# Altium PCB Right_Board.PcbDoc (part 2 of 2)
Units mm, origin at the board's own origin, x right, y up, seen from the top; angles counter-clockwise.
Board outline 34.7 x 82.01 mm, 6 copper layers (Top Layer, Layer 2, Layer 3, Layer 4, Layer 5, Bottom Layer), stack 1.538 mm thick; 65 components, 45 nets, 288 pads, 262 vias.
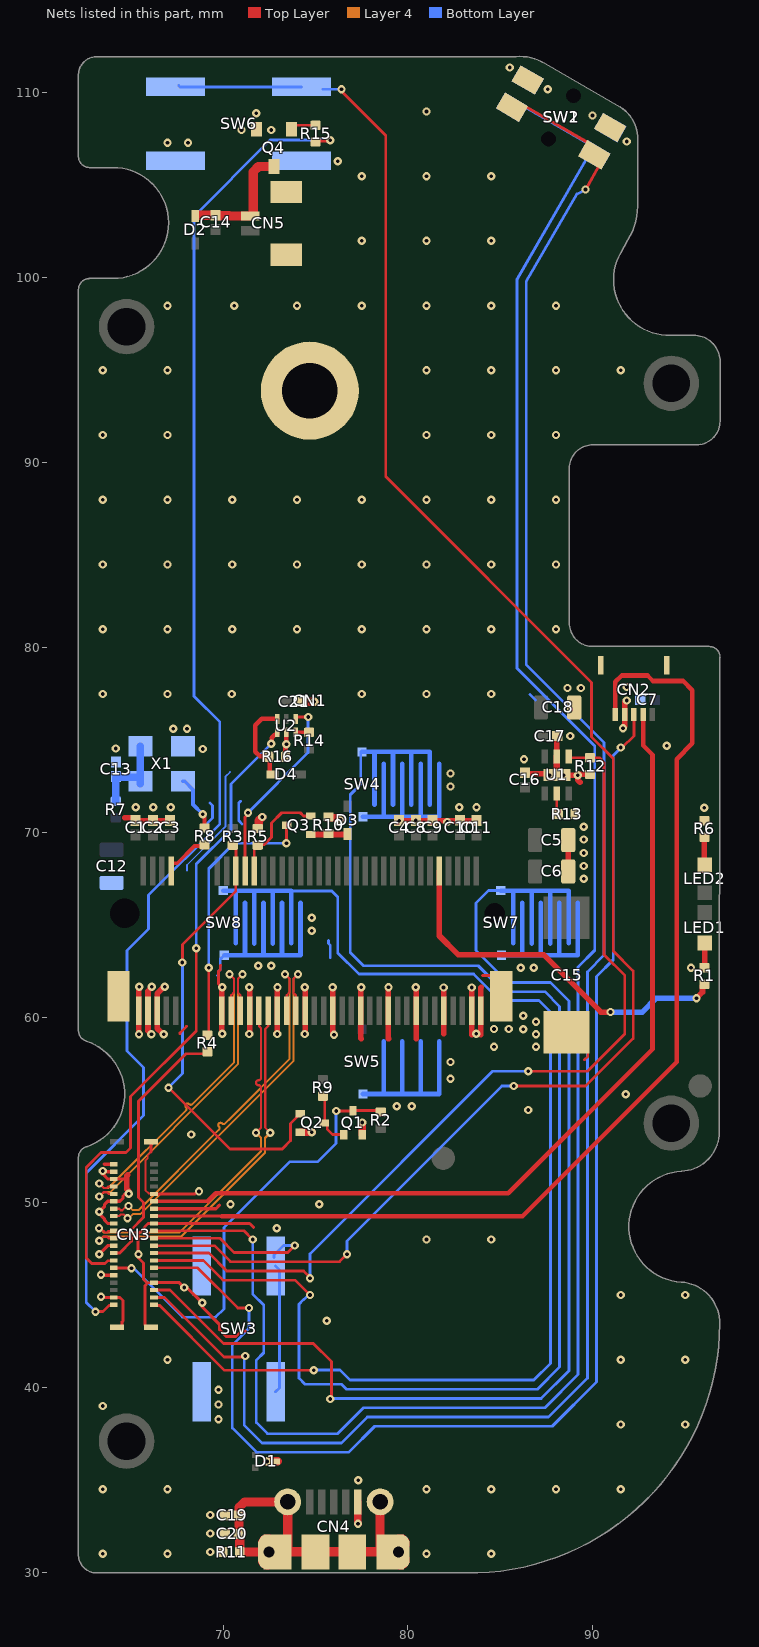
[diagram p6: the nets of this part, all layers, seen from the top]

## Via types
v1: diameter 0.45, hole 0.2, Top Layer to Bottom Layer, tented both sides, 262 vias

## Nets (pads, with @x,y where several pads share a name; then routed paths per layer and width w, separated by ;. In a path a pad name is that pad's centre, name@x,y a point inside that pad or via, vN(x,y) a via of type N, cw(c..) or ccw(c..) an arc to the next point about the centre after c; other vN are vias at no path point) (continued)
GND: C1.2 C2.2 C3.2 C4.2 C5.2 C6.2 C7.2 C8.2 C9.2 C10.2 C11.2 C12.2 C13.2 C15.2 C16.2 C17.2 C18.2 C19.2 C20.2 C21.2 CN1.1 CN1.3 CN1.9 CN1.15 CN1.21 CN1.27 CN1.33 CN1.39 CN1.45 CN1.51 CN1.57 CN1.71 CN1.73 CN1.75 CN1.MP1 CN1.MP2 CN1.MP3 CN2.4 CN2.6 CN2.7 CN3.2 CN3.4 CN3.6 CN3.9 CN3.12 CN3.13 CN3.17 CN3.18 CN3.24 CN3.32 CN3.33 CN3.38 CN3.MP1 CN3.MP3 CN3.MP4 CN4.5 CN5.3 CN5.4 D1.3 Q1.2 Q2.2 Q4.2 R5.2 R6.1 R10.2 R11.2 R12.1 R13.2 R16.2 SW1.2 SW1.4 SW2.2 SW2.4 SW3.2 SW3.3 SW4.2 SW5.2 SW6.2 SW6.3 SW7.2 SW8.2 U1.5 U1.7 U2.2 X1.2 | length 113.2
  Top Layer w0.1: 66.107,52.732 65.925,52.55 65.925,52.398 65.812,52.285 65.812,50.647 65.971,50.489 66.217,50.489 CN3.9@66.231,50.475
  Top Layer w0.15: v1@65.425,47 65.7,46.725 65.7,45.85 65.875,45.675 65.875,45.625 ; CN3.MP3@65.825,43.325 65.775,43.375 65.775,45.5 65.941,45.666 CN3.33@66.272,45.666 ; 66.107,52.732 CN3.MP1@66.107,53.276 ; 67.675,59.125 67.675,59.175 68.025,59.525 ; 69.8,43.125 70.175,42.75 70.7,42.75 71,43.05 ; 69.875,62.825 69.85,62.8 69.85,62.6 69.75,62.5 69.75,61.825 69.944,61.631 v1@69.975,61.6 ; 84.025,62.275 84.7,62.275 CN1.MP1@84.725,62.25 ; 89.55,57.725 89.725,57.9 C15.2@89.725,58.2
  Top Layer w0.17: v1(63.3,47.2) 63.597,47.497 63.597,47.499 63.764,47.666 CN3.24@64.092,47.666 ; v1(63.4,44.9) 63.434,44.866 64.42,44.866 64.587,44.699 64.587,43.586 64.53,43.529 64.53,43.321 64.465,43.256 CN3.MP4@64.257,43.256 ; v1(63.4,46.1) 63.434,46.066 CN3.32@64.092,46.066 ; v1@63.429,51.574 63.468,51.535 63.511,51.535 63.78,51.266 CN3.6@64.092,51.266 64.655,51.266 64.666,51.277 ; v1@63.526,51.686 63.546,51.666 CN3.4@64.092,51.666 ; 63.577,52.075 63.586,52.066 CN3.2@64.092,52.066 ; 63.753,48.876 63.762,48.866 CN3.18@64.092,48.866 ; 63.753,48.876 63.597,49.033 63.597,49.103 63.3,49.4 v1(63.3,49.5) 63.597,49.797 63.597,49.899 63.764,50.066 63.967,50.066 64.42,50.066 64.587,50.233 64.587,50.351 64.713,50.477 v1(64.903,50.477) ; v1@65.425,47 v1(65.425,47.2) 65.4,47.225 65.4,48.3 65.777,48.677 65.777,48.699 65.944,48.866 66.147,48.866 CN3.17@66.272,48.866 71.434,48.866 71.65,48.65 ; CN3.33@66.272,45.666 67.634,45.666 v1(67.9,45.4) 68.05,45.4 v1(68.875,44.575) 68.875,44.35 69.8,43.425 69.8,43.125 ; CN3.13@66.272,49.666 69.616,49.666 69.8,49.85 ; CN3.9@66.272,50.466 68.49,50.466 68.624,50.6 v1(68.7,50.6) ; 71,43.05 71.2,43.05
  Top Layer w0.25: R16.2@73.375,74.1 73.375,74.7 v1@73.425,74.75 ; v1@73.425,74.8 U2.2@73.425,75.425
  Top Layer w0.3: 64.696,70.8 64.979,70.8 64.984,70.795 65.155,70.795 65.275,70.675 C1.2@65.275,70.655 C2.2@66.2,70.655 ; 64.85,51.5 64.8,51.45 64.8,50.725 64.903,50.622 v1(64.903,50.477) ; v1(65.45,59.1) 65.44,59.11 65.44,61.599 65.475,61.634 v1(65.475,61.675) ; v1(66.125,59.1) 65.94,59.285 65.94,61.435 66.15,61.645 v1(66.15,61.675) ; C2.2@66.2,70.65 67.1,70.65 C3.2@67.15,70.7 ; v1@66.805,59.045 66.805,59.055 66.731,59.129 66.721,59.129 66.44,59.41 66.44,61.294 66.821,61.675 v1(66.85,61.675) ; v1@69.94,61.6 CN1.57@69.94,60.374 69.94,59.135 v1(69.95,59.125) ; v1@69.944,61.631 v1(69.948,61.635) ; v1(71.423,59.11) 71.44,59.127 CN1.51@71.44,60.374 71.44,61.618 v1(71.423,61.635) ; v1(72.923,59.11) 72.94,59.127 CN1.45@72.94,60.374 72.94,61.627 v1(72.948,61.635) ; v1(74.423,59.11) 74.44,59.127 CN1.39@74.44,60.374 74.44,61.618 v1(74.423,61.635) ; v1(75.923,61.635) 75.94,61.618 CN1.33@75.94,60.374 75.94,59.135 v1(76,59.075) ; 77.473,58.858 77.44,58.891 CN1.27@77.44,60.374 77.44,61.602 v1(77.473,61.635) ; 78.948,58.85 78.94,58.858 CN1.21@78.94,60.374 78.94,61.627 v1(78.948,61.635) ; C4.2@79.525,70.655 83.72,70.655 C11.2@83.775,70.6 ; v1(80.423,61.635) 80.44,61.618 CN1.15@80.44,60.374 80.44,58.85 ; v1(81.925,61.625) 81.94,61.61 CN1.9@81.94,60.374 81.94,59.124 ; 83.44,59.073 83.45,59.083 v1(83.45,61.625) ; v1(83.69,59.124) 83.889,59.124 83.94,59.073 CN1.1@83.94,60.374 83.94,61.605 83.97,61.635 ; C16.2@86.4,73.175 87.575,73.175 v1(87.65,73.1) ; U1.5@88.05,74.125 C17.2@88.05,75.175 ; v1(88.425,73.1) v1@89.15,73.1 ; C6.2@88.625,68.25 88.665,68.29 C5.2@88.665,69.6 ; v1(89.175,73.1) 89.175,72.85 89.3,72.725 ; v1@89.3,73.15 R12.1@89.85,73.15 ; v1(91.625,75.65) 91.714,75.739 CN2.4@91.714,76.394 91.714,77.039 v1(91.825,77.15)
  Top Layer w0.35: U1.7@88.05,73.125 U1.5@88.05,74.125
  Top Layer w0.4: Q2.2@74.175,53.8 v1@74.819,53.8 ; R10.2@75.7,70.85 75.736,70.814 76.223,70.814 76.336,70.7 v1(76.35,70.7) ; CN4.5@77.292,33.811 77.292,32.658 v1@77.3,32.65 ; v1@77.511,54.315 77.524,54.302 Q1.2@77.524,53.657
  Top Layer w0.45: R5.2@71.875,70.225 71.9,70.225 71.925,70.25 71.925,70.65 v1(72.125,70.85) ; v1(72.375,36) D1.3@72.959,36 ; C21.2@74.275,77.075 v1(74.925,77.075)
  Bottom Layer w0.1: 68.05,67.95 68.05,68.25 70.125,70.325 70.125,73.025 70.375,73.275
  Bottom Layer w0.15: 68.875,70.25 69.425,70.8 69.425,71.475 69.3,71.6 ; 69.7,62.275 69.75,62.325 69.75,62.5 69.85,62.6 69.85,63.155 SW8.2@70.061,63.366 ; 70.95,71.7 70.85,71.6 70.85,70.65 71.025,70.475 ; 75.7,64.175 75.7,64 75.8,63.9 75.8,63.25 ; 86.6,77.475 86.9,77.175
  other v1: 63.5,31 67,31 81,31 84.5,31 69.3,31.1 69.3,32.1 77.3,32.625 69.3,33.1 63.5,34.5 67,34.5 81,34.5 84.5,34.5 88,34.5 91.5,34.5 77.31,34.974 91.5,38 95,38 69.75,38.275 63.5,39 69.75,39.075 69.75,39.875 67,41.5 91.5,41.5 95,41.5 75.6,43.6 91.5,45 95,45 81,48 84.5,48 72.9,48.6 70.4,49.9 75.2,49.9 63.5,51.7 68.275,53.675 74.8,53.8 77.525,54.325 86.5,55 79.4,55.2 80.2,55.2 91.775,55.85 82.3,56.7 82.3,57.6 84.648,58.425 86.925,58.425 66.8,59.1 86.925,59.1 84.648,59.385 85.448,59.385 86.225,59.375 86.925,59.775 86.225,60.1 86.1,62.7 86.8,62.7 95.3,62.7 71.9,62.8 72.6,62.8 74.8,64.7 74.8,65.4 89.5,67.5 89.5,68.2 89.5,68.9 89.5,69.625 89.5,70.325 82.125,70.575 79.525,70.65 80.425,70.675 96.025,71.35 65.275,71.375 66.225,71.375 67.175,71.375 82.775,71.375 83.7,71.375 82.3,72.5 82.3,73.2 86.275,73.975 68.9,74.525 64.2,74.55 94,74.7 73.425,74.775 88.775,75.225 67.3,75.625 68.05,75.625 63.5,77.5 67,77.5 70.475,77.5 77.5,77.5 81,77.5 84.5,77.5 88.625,77.825 89.35,77.825 91.825,77.875 63.5,81 67,81 70.5,81 74,81 77.5,81 81,81 84.5,81 88,81 63.5,84.5 67,84.5 70.5,84.5 74,84.5 77.5,84.5 81,84.5 84.5,84.5 88,84.5 63.5,88 67,88 70.5,88 74,88 77.5,88 81,88 84.5,88 88,88 63.5,91.5 67,91.5 81,91.5 84.5,91.5 88,91.5 63.5,95 67,95 81,95 84.5,95 88,95 91.5,95 67,98.5 70.6,98.5 74,98.5 77.5,98.5 81,98.5 84.5,98.5 88,98.5 77.5,102 81,102 84.5,102 77.5,105.5 81,105.5 84.5,105.5 76.2,106.3 67,107.3 68.1,107.3 91.825,107.375 71,108 72.6,108 89.975,108.775 71.8,108.9 81,109 87.55,110.2 85.5,111.375
HK/MISO: CN3.23 SW6.1 SW6.4 | length 97.1
  Top Layer w0.15: CN3.23@66.272,47.666 69.534,47.666 70.4,46.8 76.3,46.8 v1(76.7,47.2) ; v1@76.4,110.1 76.419,110.1 76.518,110.001 76.518,109.982 78.8,107.7 78.8,89.25 89.925,78.125 89.925,75.175 91.1,74 91.1,63.6 92.175,62.525 92.175,58.875 89.6,56.3 v1@85.738,56.3
  Bottom Layer w0.15: SW6.4@67.6,110.4 67.677,110.323 SW6.1@74.236,110.323 ; SW6.1@75.4,110.2 v1(76.4,110.2) ; v1(76.7,47.2) 76.7,47.925 85.075,56.3 v1(85.725,56.3)
L1/SCK: CN3.19 SW1.1 SW1.3 | length 109.1
  Top Layer w0.15: CN3.19@66.272,48.466 66.277,48.47 71.129,48.47 v1(71.6,48)
  Bottom Layer w0.15: v1(71.6,48) 71.6,45.05 72.2,44.45 72.2,41.875 71.8,41.475 71.8,38.1 72.4,37.5 76.2,37.5 77.6,38.9 87.4,38.9 89.2,40.7 89.2,62.741 90.1,63.641 90.1,74.689 85.9,78.889 85.9,99.941 89.718,106.554 SW1.3@90.08,106.651
  Bottom Layer w0.175: SW1.1@85.841,109.134 86.286,109.253 SW1.3@89.884,107.176 ; SW1.3@90.08,106.38 SW1.3@90.08,106.651
L2: CN3.37 SW2.1 SW2.3 | length 104.2
  Top Layer w0.15: CN3.37@66.272,44.866 66.834,44.866 70.05,41.65 71.15,41.65 v1(71.2,41.7) ; v1(89.6,104.775) 90.463,106.269 SW2.1@90.079,106.652
  Top Layer w0.17: SW2.3@86.194,109.358 SW2.1@89.766,107.296
  Bottom Layer w0.15: v1(71.2,41.7) 71.15,41.65 71.15,37.95 72.1,37 76.4,37 77.8,38.4 87.6,38.4 89.7,40.5 89.7,62.475 90.6,63.375 90.6,74.875 86.4,79.075 86.4,99.814 89.122,104.53 v1(89.6,104.775)
L3/MOSI: CN2.3 CN3.29 | length 71.7
  Top Layer w0.15: CN3.29@66.272,46.466 68.634,46.466 70.8,44.3 v1(71.4,44.3) ; v1(91.5,74.6) 91.581,74.6 92.214,75.233 CN2.3@92.214,76.394
  Bottom Layer w0.15: v1(71.4,44.3) 71.4,43.2 70.5,42.3 70.5,37.8 71.8,36.5 76.8,36.5 78.2,37.9 87.8,37.9 90.2,40.3 90.2,62.225 91.1,63.125 91.1,74.162 91.5,74.562 v1(91.5,74.6)
LEFT: CN3.35 SW7.1 | length 57
  Top Layer w0.15: CN3.35@66.272,45.266 67.134,45.266 70.025,42.375 74.875,42.375 75.858,41.392 75.858,39.613 75.857,39.432 v1(75.8,39.375)
  Bottom Layer w0.15: v1(75.8,39.375) 75.825,39.4 87.2,39.4 88.7,40.9 88.7,60.9 87.7,61.9 85.4,61.9 83.675,63.625 83.675,66.2 84.35,66.875 SW7.1@84.95,66.875
LX: CN2.5 CN3.15 | length 58.6
  Top Layer w0.17: CN3.15@66.272,49.266 69.934,49.266
  Top Layer w0.25: 69.934,49.266 86.191,49.266 94.525,57.6 94.525,73.975 95.375,74.825 95.375,77.7 94.875,78.2 93.25,78.2 92.95,78.5 91.55,78.5 91.214,78.164 CN2.5@91.214,76.394
LY: CN2.2 CN3.11 | length 48.7
  Top Layer w0.17: CN3.11@66.272,50.066 69.166,50.066
  Top Layer w0.25: 69.166,50.066 69.6,50.5 85.425,50.5 93.225,58.3 93.225,74.2 92.714,74.711 CN2.2@92.714,76.394
M2_ACT: CN1.10 R1.1 | length 20.4
  Top Layer w0.3: CN1.10@81.69,67.924 81.69,64.425 82.715,63.4 87.33,63.4 90.43,60.3 v1(90.95,60.3) ; v1(95.6,61.05) 95.925,61.375 95.925,61.7 R1.1@96.025,61.8
  Bottom Layer w0.3: v1(90.95,60.3) 92.675,60.3 93.425,61.05 v1(95.6,61.05)
NetC13_1: C13.1 R7.2 X1.1 X1.4 | length 4.4
  Bottom Layer w0.4: R7.2@64.2,71.7 C13.1@64.2,72.975 ; C13.1@64.235,73 X1.4@65.375,73 ; X1.4@65.525,72.65 X1.1@65.525,74.675
NetC14_2: C14.2 CN5.2 D2.2 Q4.3 | length 6.2
  Top Layer w0.5: D2.2@68.679,103.39 C14.2@69.6,103.39 ; C14.2@69.6,103.355 70.325,103.355 ; 70.4,103.35 71.468,103.35 CN5.2@71.471,103.347 ; CN5.2@71.626,103.481 71.626,105.731 71.916,106.021 Q4.3@72.751,106.021
NetD3_1: D3.1 Q3.1 R10.1 | length 2
  Top Layer w0.3: Q3.1@74.75,69.9 75.7,69.9 76.7,69.9 D3.1@76.725,69.925
NetD4_1: D4.1 R16.1 U2.6 | length 4.5
  Top Layer w0.25: R16.1@72.475,74.1 72.525,74.05 D4.1@72.525,73.2 ; R16.1@72.475,74.116 72.463,74.129 71.996,74.129 71.75,74.375 71.75,75.8 72.101,76.151 U2.6@72.925,76.151
NetLED1_2: LED1.2 R1.2 | length 1.4
  Top Layer w0.3: R1.2@95.975,62.7 96.05,62.775 LED1.2@96.05,64.025
NetLED2_2: LED2.2 R6.2 | length 1.8
  Top Layer w0.3: LED2.2@95.85,68.075 LED2.2@95.95,67.975 ; R6.2@96.025,69.7 96.025,68.175 LED2.2@96.125,68.075
NetQ1_1: Q1.1 Q2.3 R9.2 | length 3
  Top Layer w0.15: Q2.3@75.5,54.382 R9.2@75.5,55.9 ; Q2.3@75.575,54.357 75.628,54.305 75.628,53.98 75.925,53.682 Q1.1@76.55,53.682
NetQ4_1: Q4.1 R15.2 | length 1.4
  Top Layer w0.15: Q4.1@73.701,108.041 73.91,108.25 R15.2@75,108.25
NetR8_1: R8.1 X1.3 | length 3.1
  Top Layer w0.2: v1(68.9,71) 68.9,70.932 69,70.832 R8.1@69,70.25
  Bottom Layer w0.2: X1.3@67.825,72.775 67.925,72.775 68.375,72.325 68.375,71.525 v1(68.9,71)
NetR13_1: R13.1 U1.2 | length 1.2
  Top Layer w0.15: U1.2@88.05,72.125 88.05,71.075 R13.1@88.125,71
NetR14_1: R14.1 U2.3 | length 0.7
  Top Layer w0.2: U2.3@73.925,75.425 R14.1@74.65,75.425
PCIE_CLK_N: CN1.53 CN3.10 | length 18.5
  Top Layer w0.118: v1(63.3,50.325) 63.527,50.552 63.715,50.552 63.801,50.466 CN3.10@64.092,50.466 ; CN1.53@70.94,60.374 70.94,61.208 70.814,61.334 70.814,62.114 v1(71.05,62.35)
  Layer 4 w0.11: v1(63.3,50.325) 63.54,50.565 63.891,50.565 70.82,57.494 70.82,62.12 v1(71.05,62.35)
PCIE_CLK_P: CN1.55 CN3.8 | length 18.4
  Top Layer w0.118: v1(63.3,51.025) 63.545,50.78 63.715,50.78 63.801,50.866 CN3.8@64.092,50.866 ; v1(70.35,62.35) 70.586,62.114 70.586,61.354 70.44,61.208 CN1.55@70.44,60.374
  Layer 4 w0.11: v1(63.3,51.025) 63.54,50.785 63.8,50.785 67.956,54.941 67.995,54.98 ccw(c67.911,55.065) 67.995,55.15 67.994,55.151 cw(c68.079,55.236) 67.994,55.321 cw(c68.079,55.236) 68.164,55.321 68.165,55.32 ccw(c68.25,55.405) 68.335,55.32 69.582,56.568 70.6,57.585 70.6,62.1 v1(70.35,62.35)
PCIE_CLK_REQ: CN3.28 U2.1 | length 35.2
  Top Layer w0.15: CN3.28@64.092,46.866 64.082,46.856 63.768,46.856 63.612,46.7 62.9,46.7 62.6,47 62.6,51.9 63.4,52.7 64.75,52.7 65,52.95 65,55.725 68.55,59.275 v1(68.55,63.75)
  Top Layer w0.25: v1(72.6,74.8) 72.638,74.838 72.638,75.138 72.788,75.287 72.925,75.287 U2.1@72.925,75.425
  Bottom Layer w0.15: v1(68.55,63.75) 68.55,68.3 70.425,70.175 70.425,72.625 v1@72.575,74.775
PCIE_CLK_REQ_SW: CN1.52 U2.4 | length 10.4
  Top Layer w0.15: CN1.52@71.19,67.924 71.19,70.834 71.35,70.994 v1(71.35,71.075) ; U2.4@73.925,76.151 73.925,76.2 73.975,76.25 v1(74.6,76.25)
  Bottom Layer w0.15: v1(71.35,71.075) 74.6,74.325 74.6,76.15 v1@74.625,76.175
PCIE_EN: CN3.25 R12.2 U1.4 | length 49.5
  Top Layer w0.15: CN3.25@66.272,47.266 69.234,47.266 70.2,46.3 74.358,46.3 74.7,45.958 v1(74.7,45.9) ; v1(86.5,57.1) 89.7,57.1 91.725,59.125 91.725,62.275 90.6,63.4 90.6,73.8 90.35,74.05 R12.2@89.85,74.05 88.775,74.05 U1.4@88.7,74.125
  Bottom Layer w0.15: v1(74.7,45.9) 74.7,47.225 84.575,57.1 v1(86.5,57.1)
PCIE_nWAKE: CN1.54 Q2.1 R3.2 | length 24.2
  Top Layer w0.15: v1(67.05,56.2) 67.075,56.2 70.375,52.9 73.2,52.9 73.645,53.345 73.645,54.27 73.995,54.62 73.995,54.675 74.12,54.8 Q2.1@74.175,54.8 ; v1(67.8,62.975) 67.8,63.95 70.69,66.84 CN1.54@70.69,67.924 ; CN1.54@70.7,68.25 R3.2@70.7,69.325
  Bottom Layer w0.15: v1(67.05,56.2) 67.05,56.221 67.8,56.971 v1(67.8,62.975)
PCIE_nWAKE_B: CN3.30 Q1.3 R2.2 | length 23.6
  Top Layer w0.15: CN3.30@64.092,46.466 64.1,46.458 65.042,46.458 v1(65.05,46.45) ; v1(76.125,54.95) Q1.3@77.024,54.95 ; Q1.3@77.042,54.975 R2.2@78.475,54.975
  Bottom Layer w0.15: v1(65.05,46.45) 65.15,46.45 67.8,43.8 69.6,43.8 70.05,44.25 70.05,48.65 73.6,52.2 75.1,52.2 76.1,53.2 v1@76.1,54.9
PCIE_RST: Q3.3 R4.1 | length 14.6
  Top Layer w0.15: R4.1@69.15,59.05 69.225,59.125 v1(69.225,62.7) ; v1(73.425,69.425) Q3.3@73.425,70.275
  Bottom Layer w0.15: v1(69.225,62.7) 69.225,68.05 70.6,69.425 v1@73.4,69.425
PCIE_RST_B: CN3.26 R4.2 | length 14
  Top Layer w0.15: CN3.26@64.092,47.266 64.102,47.276 64.416,47.276 65.05,47.91 65.05,48.55 65.7,49.2 65.7,50 65.425,50.275 65.425,55.475 67.997,58.047 69.122,58.047 R4.2@69.15,58.075
PCIE_RST_SW: CN1.50 Q3.2 R5.1 | length 5.5
  Top Layer w0.15: CN1.50@71.69,67.924 R5.1@71.69,69.265 ; R5.1@71.85,69.35 72.225,69.35 72.625,69.75 72.625,70.525 73.175,71.075 74.175,71.075 74.35,70.9 Q3.2@74.75,70.9
  Top Layer w0.25: R5.1@71.84,69.265 R5.1@71.85,69.275
PCIE_RX_N: CN1.41 CN3.16 | length 20.3
  Top Layer w0.118: CN3.16@64.092,49.266 64.383,49.266 64.469,49.352 64.627,49.352 v1(64.836,49.143) ; CN1.41@73.94,60.374 73.94,61.208 73.814,61.334 73.814,62.114 v1(74.05,62.35)
  Layer 4 w0.11: v1(64.836,49.143) 64.898,49.143 65.123,49.367 65.516,49.367 73.82,57.671 73.82,62.12 v1(74.05,62.35)
PCIE_RX_P: CN1.43 CN3.14 | length 20.2
  Top Layer w0.118: CN3.14@64.092,49.666 64.383,49.666 64.469,49.58 64.556,49.58 64.788,49.812 v1(64.888,49.812) ; v1(73.35,62.35) 73.586,62.114 73.586,61.354 73.44,61.208 CN1.43@73.44,60.374
  Layer 4 w0.11: v1(64.888,49.812) 65.113,49.587 65.425,49.587 69.737,53.899 69.776,53.938 ccw(c69.691,54.023) 69.776,54.108 ; 69.776,54.108 cw(c69.86,54.193) 69.776,54.278 cw(c69.86,54.193) 69.945,54.278 ; 69.946,54.278 ccw(c70.03,54.363) 70.115,54.278 70.435,54.597 73.6,57.762 73.6,62.1 v1(73.35,62.35)
PCIE_TX_N: CN1.47 CN3.22 | length 19.8
  Top Layer w0.118: v1(63.3,47.925) 63.527,48.152 63.715,48.152 63.801,48.066 CN3.22@64.092,48.066 ; CN1.47@72.44,60.374 72.44,59.54 72.283,59.383 72.283,54.051 v1(72.557,53.777)
  Layer 4 w0.11: v1(63.3,47.925) 63.535,48.16 67.747,48.16 72.27,52.684 72.27,53.49 v1(72.557,53.777)
PCIE_TX_P: CN1.49 CN3.20 | length 19.8
  Top Layer w0.118: v1(63.291,48.616) 63.392,48.616 63.628,48.38 63.715,48.38 63.801,48.466 CN3.20@64.092,48.466 ; v1(71.782,53.777) 72.055,54.051 72.055,56.15 72.055,56.209 ccw(c71.921,56.209) 71.921,56.343 71.917,56.343 cw(c71.917,56.477) 71.917,56.611 71.921,56.611 ccw(c71.921,56.745) 72.055,56.745 72.055,57.268 72.055,59.425 71.94,59.54 CN1.49@71.94,60.374
  Layer 4 w0.11: v1(63.291,48.616) 63.527,48.38 67.655,48.38 72.05,52.775 72.05,53.509 v1(71.782,53.777)
RIGHT: CN3.39 SW8.1 | length 61
  Top Layer w0.15: CN3.39@66.272,44.466 66.312,44.426 66.574,44.426 70.075,40.925 v1(74.9,40.925)
  Bottom Layer w0.15: 73.686,66.85 75.875,66.85 76.2,66.525 76.2,63.5 77.35,62.35 83.55,62.35 84.975,60.925 87.075,60.925 87.7,60.3 87.7,41.3 86.8,40.4 76.866,40.4 76.316,40.95 74.925,40.95 v1(74.9,40.925)
SELECT: CN3.21 SW3.1 SW3.4 | length 16.5
  Top Layer w0.15: CN3.21@66.272,48.066 69.834,48.066 70.6,47.3 73.5,47.3 v1(73.875,47.675)
  Bottom Layer w0.15: SW3.4@72.75,47.025 72.75,47.164 73.261,47.675 v1(73.875,47.675) ; SW3.1@72.836,39.766 73.05,39.98 73.05,46.352 SW3.4@72.836,46.566
SGND: C19.1 C20.1 CN4.6 CN4.7 CN4.8 CN4.9 CN4.10 CN4.11 R11.1 | length 18.6
  Top Layer w0.5: C19.1@70.86,33.075 70.88,33.095 70.88,33.518 71.173,33.811 CN4.6@73.492,33.811 CN4.8@73.492,31.111 ; C20.1@70.865,32.075 C19.1@70.865,33.075 ; C20.1@70.9,32.04 R11.1@70.9,31.1 72.392,31.1 CN4.8@72.481,31.1 ; CN4.8@72.492,31.111 CN4.8@73.492,31.111 ; CN4.7@78.492,33.811 78.492,31.205 CN4.11@78.587,31.111 ; CN4.11@78.942,31.111 CN4.11@78.587,31.111 ; CN4.8@73.492,31.111 CN4.9@74.992,31.111 CN4.10@76.992,31.111 CN4.11@78.587,31.111
SUSCLK: CN1.68 R8.2 | length 2.3
  Top Layer w0.2: CN1.68@67.225,68.275 67.225,68.333 67.24,68.348 67.523,68.348 68.45,69.275 R8.2@69.075,69.275
UP: CN3.27 SW4.1 | length 71.9
  Top Layer w0.15: CN3.27@66.272,46.866 68.934,46.866 70,45.8 73.9,45.8 v1(74.7,45)
  Bottom Layer w0.15: v1(74.7,45) 74.619,45 74.375,44.756 74.356,44.756 74.1,44.5 74.1,40.5 74.425,40.175 76.4,40.175 76.675,39.9 87,39.9 88.2,41.1 88.2,60.6 87.4,61.4 85.2,61.4 83.8,62.8 77.6,62.8 76.875,63.525 76.875,72.05 77.45,72.625 77.45,74.3 SW4.1@77.475,74.325
VIB: CN3.40 R15.1 | length 74.8
  Top Layer w0.15: v1(63.1,44.1) 63.5,44.1 63.826,44.426 64.052,44.426 CN3.40@64.092,44.466 ; R15.1@75,107.35 75.049,107.399 75.751,107.399 v1(75.8,107.448)
  Bottom Layer w0.15: v1(63.1,44.1) 62.6,44.6 62.6,51.6 65.7,54.7 65.7,57.3 64.8,58.2 64.8,63.625 65.975,64.8 65.975,66.625 69.825,70.475 69.825,75.975 68.425,77.375 68.425,103.325 72.548,107.448 v1(75.8,107.448)
pads on no net: CN1.5 CN1.6 CN1.7 CN1.8 CN1.11 CN1.13 CN1.17 CN1.19 CN1.20 CN1.22 CN1.23 CN1.24 CN1.25 CN1.26 CN1.28 CN1.29 CN1.30 CN1.31 CN1.32 CN1.34 CN1.35 CN1.36 CN1.37 CN1.38 CN1.40 CN1.42 CN1.44 CN1.46 CN1.48 CN1.56 CN1.58 CN1.67 CN1.69 CN1.MH1 CN1.MH2 CN3.MP2 CN4.1 CN4.4 SW1.MH1 SW1.MH2 U1.3

## Polygon pours and split planes (outlines as drawn)
GND on Top Layer "GND_L01_P010" (solid, remove dead copper, pour order 10): 60,115 57.5,112.5 57.5,27.5 60,25 112.5,25 115,27.5 115,112.5 112.5,115
+3V3_M2 on Top Layer "+3V3_M2_L01_P008" (solid, pour order 8): 79.3,70.2 79.2,70.1 79.2,68.9 79.5,68.6 79.5,66.6 79.7,66.4 81.2,66.4 81.3,66.5 81.3,68.9 81.4,69 82.9,69 83.1,68.8 83.1,64.4 83.5,64 89.5,64 89.8,64.3 89.8,66.6 89.6,66.8 87.4,66.8 87.3,66.9 87.3,70.2 87.2,70.3 87.2,70.9 87.6,71.3 87.6,72.4 87.5,72.5 87,72.5 86.8,72.7 84.3,72.7 84.2,72.6 84.2,70.3 84.1,70.2
GND on Top Layer "GND_L01_P014" (solid, pour order 14): 64.302,52.181 63.372,52.181 62.9,51.709 62.9,51.187 62.972,51.115 62.981,51.124 64.797,51.124 64.996,51.323 64.996,52.161 64.922,52.235 64.366,52.235 64.352,52.221
+3V3 on Top Layer "+3V3_L01_P009" (solid, pour order 9): 66,52.1 66,50.9 66.1,50.8 68,50.8 68.4,51.2 85.1,51.2 85.2,51.3 85.2,53.4 85,53.6 78.2,53.6 77.7,53.1 74,53.1 73.3,52.4 66.3,52.4
+3V3_M2 on Top Layer "+3V3_M2_L01_P006" (solid, pour order 6): 63.4,70.2 63.3,70.1 63.3,68.7 63.3,67.2 63.4,67.1 66.7,67.1 66.8,67.2 66.8,69.1 66.9,69.2 67.3,69.2 67.4,69.3 67.4,70.1 67.3,70.2
+3V3 on Top Layer "+3V3_L01_P004" (solid, pour order 4): 93.1,75.4 93.2,75.3 94.4,75.3 94.5,75.4 94.5,77.4 94.4,77.5 93.2,77.5 93.1,77.4
+3V3 on Top Layer "+3V3_L01_P003" (solid, pour order 3): 85.3,77.4 85.2,77.3 85.2,74.6 85.3,74.5 86.5,74.5 86.6,74.4 86.6,73.9 86.7,73.8 87.5,73.8 87.6,73.9 87.6,77.3 87.5,77.4
+3V3 on Top Layer "+3V3_L01_P001" (solid, pour order 1): 70,101.4 70.1,101.3 72.2,101.3 72.3,101.4 72.3,102.7 72.2,102.8 70.1,102.8 70,102.7
GND on Bottom Layer "GND_L06_P015" (solid, remove dead copper, pour order 15): 49.775,114.95 47.275,112.45 47.275,27.45 49.775,24.95 102.275,24.95 104.775,27.45 104.775,112.45 102.275,114.95
+3V3_M2 on Bottom Layer "+3V3_M2_L06_P007" (solid, pour order 7): 63.3,70.2 63.3,70.1 63.3,68.7 63.4,68.6 65.3,68.6 65.5,68.8 65.5,70.7 65.4,70.8 64.9,70.8 64.7,71 63.4,71 63.3,70.9 63.3,70.4
+3V3 on Bottom Layer "+3V3_L06_P005" (solid, pour order 5): 93.1,75.4 93.2,75.3 94.4,75.3 94.5,75.4 94.5,77.4 94.4,77.5 93.2,77.5 93.1,77.4
GND on Layer 2 "GND_L02_P011" (solid, remove dead copper, pour order 11): 57.5,115 55,112.5 55,27.5 57.5,25 110,25 112.5,27.5 112.5,112.5 110,115
+3V3 on Layer 3 "+3V3_L03_P012" (solid, remove dead copper, pour order 12): 55,115 52.5,112.5 52.5,27.5 55,25 107.5,25 110,27.5 110,112.5 107.5,115
GND on Layer 4 "GND_L04_P013" (solid, remove dead copper, pour order 13): 52.5,115 50,112.5 50,27.5 52.5,25 105,25 107.5,27.5 107.5,112.5 105,115
GND on Layer 5 "GND_L05_P016" (solid, remove dead copper, pour order 16): 47.175,114.95 44.675,112.45 44.675,27.45 47.175,24.95 99.675,24.95 102.175,27.45 102.175,112.45 99.675,114.95

## Silkscreen, mask and mechanical layers (free items; w line width, h text height)
Top Overlay:
  lines w0.15: 75.75,71.275 75.75,71.7 ; 86.375,79.075 86.2,79.075 86.2,76.3 86.2,76.25 86.775,75.675 ; 71.557,37.25 71.557,50.25 91.558,50.25 91.558,37.25 71.557,37.25
Bottom Overlay:
  lines w0.1: 84.653,109.785 ccw(c84.696,109.76) 84.739,109.735 ccw(c84.696,109.76) 84.653,109.785
Board Outline:
  lines w0.15: 62.179,30.909 ccw(c63.177,30.965) 63.14,29.966 83.133,29.966 ccw(c83.315,43.512) 96.862,43.444 ; 62.179,59.272 62.179,99.381 cw(c62.784,99.36) 62.75,99.964 ; 62.181,30.912 62.181,52.466 cw(c62.785,52.435) 62.636,53.021 ; 62.183,59.268 ccw(c62.787,59.302) 62.607,58.725 ; 62.605,58.719 cw(c61.679,55.866) 62.635,53.022 ; 62.75,99.966 64.081,99.966 ccw(c64.054,102.966) 64.049,105.966 62.762,105.966 cw(c62.783,106.571) 62.179,106.537 62.179,111.004 cw(c63.179,110.967) 63.123,111.965 83.46,111.965 85.841,111.965 cw(c86.065,109.455) 87.399,111.593 91.47,109.242 cw(c90.401,107.53) 92.419,107.483 ; 89.992,80.067 96.291,80.067 cw(c96.297,79.49) 96.874,79.496 ; 89.992,80.068 cw(c89.992,81.338) 88.722,81.338 88.722,89.703 cw(c89.992,89.703) 89.992,90.973 95.604,90.972 ; 91.882,102.044 91.499,101.355 ccw(c94.122,99.899) 94.206,96.9 ; 91.884,102.043 ccw(c89.092,103.842) 92.413,103.876 92.413,107.482 ; 94.206,96.899 95.442,96.899 cw(c95.442,95.461) 96.88,95.461 96.874,92.242 ; 94.78,45.699 cw(c94.946,48.695) 94.79,51.69 ; 94.783,45.699 cw(c94.626,43.468) 96.862,43.443 ; 94.785,51.69 ccw(c94.7,53.824) 96.836,53.811 ; 95.604,90.972 ccw(c95.604,92.242) 96.874,92.242 ; 96.836,53.815 96.864,79.496
Mechanical 13:
  lines w0.1: 87.115,111.366 85.365,108.335 89.435,105.985 91.185,109.016
  lines w0.15: 61.658,31.001 61.658,52.554 ; 61.658,52.531 cw(c62.761,52.472) 62.483,53.541 ; 61.658,59.274 61.658,99.437 cw(c62.762,99.398) 62.7,100.501 64.055,100.501 ccw(c64.033,103.001) 64.029,105.501 62.722,105.501 ; 61.658,106.544 ccw(c62.761,106.606) 62.722,105.502 ; 61.658,59.274 ccw(c62.761,59.336) 62.367,58.304 ; 61.658,106.544 61.658,115.057 ; 62.391,58.291 cw(c61.658,55.901) 62.501,53.548 ; 75.323,115.364 75.323,119.864 83.588,119.864 cw(c83.68,104.114) 99.43,104.147 ; 75.705,115.364 83.764,115.364 ; 83.504,119.114 cw(c83.68,104.115) 98.68,104.147 ; 83.525,117.614 cw(c83.68,104.115) 97.18,104.174 ; 83.758,115.364 cw(c83.68,104.114) 94.93,104.037
Mechanical 15:
  lines w0.15: 13.301,38.617 ccw(c13.245,39.615) 14.244,39.578 ; 92.419,107.482 92.419,107.483

## Dimensions
94.236,54.29 to 96.05,66.75 on Mechanical 15
96.05,68.25 to 96.05,66.75 on Mechanical 15
96.05,65.675 to 96.05,64.025 on Mechanical 15
94.236,54.29 to 96.05,64.025 on Mechanical 15
96.05,64.025 to 94.236,54.29 on Mechanical 15
86.47,110.699 to 96.836,53.815 on Mechanical 13
86.47,110.699 to 85.841,111.965 on Mechanical 13
64.779,97.366 to 100.116,29.966 on Mechanical 13
63.123,111.965 to 64.779,97.366 on Mechanical 13
92.214,76.394 to 96.291,80.067 on Mechanical 13
70.836,108.323 to 63.123,111.965 on Mechanical 13
65.182,48.266 to 96.836,53.811 on Mechanical 13
96.88,95.461 to 86.125,110.493 on Mechanical 13
86.125,110.493 to 85.841,111.965 on Mechanical 13
92.214,76.394 to 96.836,53.815 on Mechanical 13
65.182,48.266 to 119.645,29.966 on Mechanical 13
39.488,28.668 to 28.959,78.136 on Mechanical 13
64.779,37.1 to 96.836,53.811 on Mechanical 13
119.645,29.966 to 64.779,37.1 on Mechanical 13
77.561,55.866 to 130.266,29.966 on Mechanical 13
70.836,43.166 to 70.836,108.323 on Mechanical 1
70.836,43.166 to 70.836,108.323 on Mechanical 13
96.836,53.815 to 70.836,43.166 on Mechanical 13
63.14,29.966 to 70.836,43.166 on Mechanical 13
85.9,41 to 63.14,29.966 on Mechanical 13
96.874,99.707 to 62.179,99.381 on Mechanical 13
94.236,94.299 to 94.236,54.29 on Mechanical 13
64.779,97.366 to 94.236,94.299 on Mechanical 13
119.645,29.966 to 94.236,54.29 on Mechanical 13
64.779,97.366 to 94.236,94.299 on Mechanical 13
94.236,94.299 to 94.236,54.29 on Mechanical 13
96.836,53.815 to 94.236,54.29 on Mechanical 13
94.79,51.69 to 94.236,54.29 on Mechanical 13
96.874,92.242 to 94.236,94.299 on Mechanical 13
62.179,99.381 to 64.779,97.366 on Mechanical 13
57.725,48.266 to 63.14,29.966 on Mechanical 13
123.181,99.899 to 83.525,117.614 on Mechanical 13
95.442,96.899 to 94.93,99.899 on Mechanical 13
98.68,104.147 to 75.023,100.801 on Mechanical 13
83.525,117.614 to 63.123,111.965 on Mechanical 13
83.588,119.864 to 82.564,115.364 on Mechanical 13
93.136,48.699 to 94.562,99.899 on Mechanical 13
63.123,111.965 to 63.14,29.966 on Mechanical 13

## Text inside footprints (layer, text, board x,y; h text height)
CN4: Mechanical 1 "PCB EDGE" at 68.792,29.561 h0.3